# Altium PCB dummypcbfile.PcbDoc
Units mil, origin at the board's own origin, x right, y up, seen from the top; angles counter-clockwise.
Board outline 3900 x 1500 mil, 2 copper layers (Top Layer, Bottom Layer); 14 components, 8 nets, 43 pads, 0 vias.
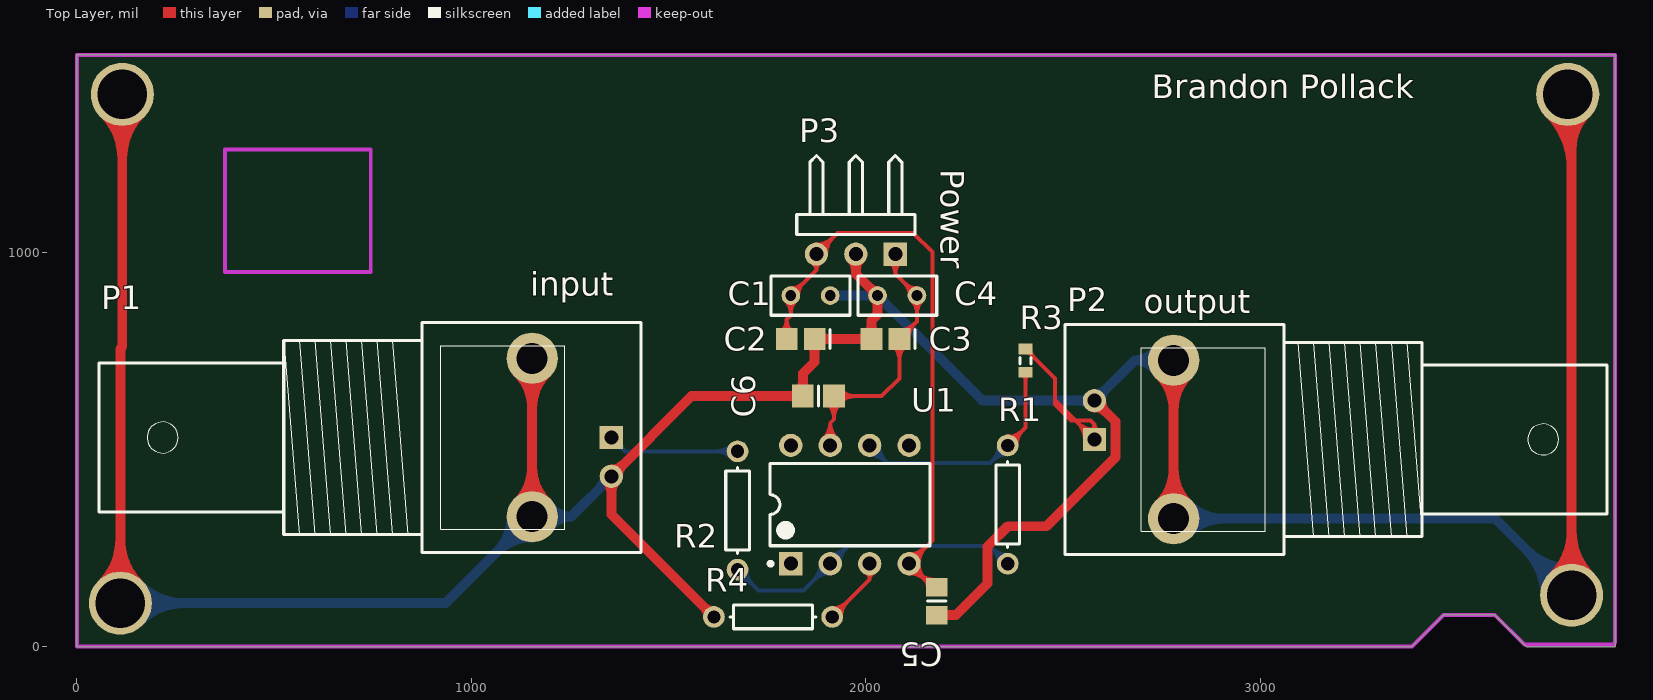
[diagram p0: Top Layer view]
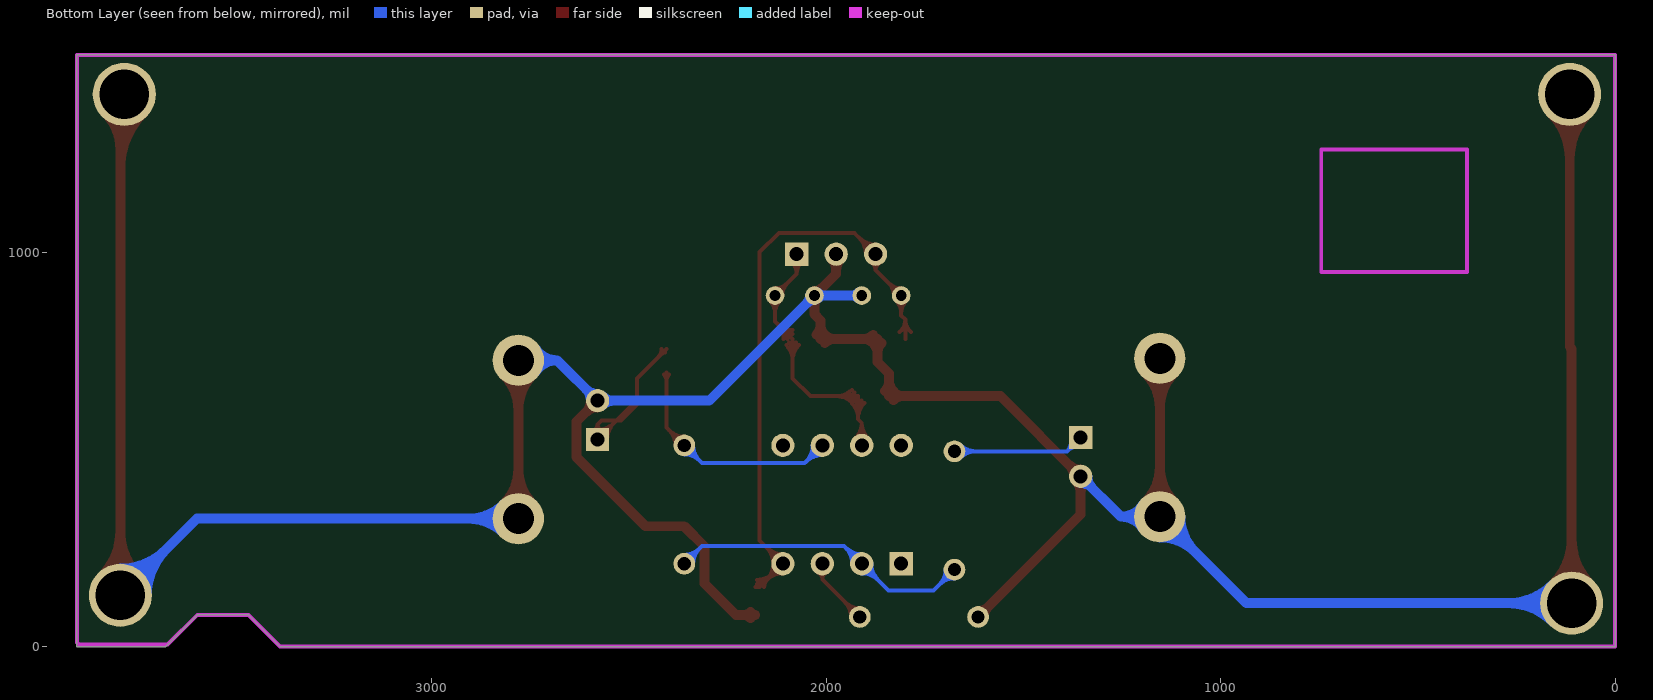
[diagram p1: Bottom Layer view, seen from below]

## Layer stack, top to bottom
Top Layer: signal copper 1.4
Dielectric: core 12.6, FR-4, Dk 4.8
Bottom Layer: signal copper 1.4

## Board outline
0,0 0,1500 3900,1500 3900,0 3675,0 3600,75 3595,80 3480,80 3465,80 3395,10 3385,0 0,0

## Design rules (kind name [scope] priority, off if disabled: settings)
Clearance [All] p1: gap=10
PolygonConnect [All] p1: connectstyle=Relief reliefconductorwidth=10 reliefentries=4 polygonreliefangle="90 Angle" airgapwidth=10
RoutingVias [All] p1: holewidth=28 width=50 viastyle="Through Hole" minholewidth=28 minwidth=50 maxholewidth=28 maxwidth=50
SilkscreenOverComponentPads [All] p1: minsilkscreentomaskgap=10
SolderMaskExpansion [All] p1: expansion=4
Width "Schematic Width Constraint" [InNet('GND')] p1: maxlimit=30 minlimit=20 preferedwidth=25
Width [All] p2: maxlimit=10 minlimit=10 preferedwidth=10
27 further rules are at their usual default settings.

## Components (designator, comment, footprint, x,y, rotation, side; value= is the part's Value field where it differs from the comment)
C1 "Cap" RAD-0.1 1860,890 r0 top
C2 "Cap Pol1" C2512 1835,780 r180 top
C3 "Cap Pol1" C2512 2050,780 r180 top
C4 "Cap" RAD-0.1 2080,890 r180 top
C5 "Cap" 6-0805_N 2180,115 r90 top
C6 "Cap" 6-0805_M 1880,635 r180 top
P1 "input" "BNC_RA CON" 1355,530 r0 top
P2 "output" "BNC_RA CON" 2580,525 r180 top
P3 "Power" HDR1X3H 2075,995 r180 top
R1 "Res1" AXIAL-0.3 2360,360 r90 top
R2 "Res1" AXIAL-0.3 1675,345 r270 top
R3 "Res3" J1-0603 2405,725 r90 top
R4 "Res1" AXIAL-0.3 1765,75 r0 top
U1 "Op Amp" DIP-8 1960,360 r90 top

## Footprints (in the part's own frame and the unit in brackets; to place one, negate y for a bottom-side part, rotate by r counter-clockwise, add the part's x,y. Pads: shape width x height; smd on the part's side, far side on the other; paste and mask are expansions set on the pad)
6-0805_M [mm] "Chip Resistor, Body 2.0x1.2mm, IPC Low Density"
  rect 1.4x1.5 smd: 1(-1,0) 2(1,0)
  silkscreen extent 0,-0.65 0,0.65, body extent -1.07,-0.7 1.07,0.7, height 0.7
6-0805_N [mm] "Chip Resistor, Body 2.0x1.2mm, IPC Medium Density"
  rect 1.2x1.4 smd: 1(-0.9,0) 2(0.9,0)
  silkscreen extent 0,-0.6 0,0.6, body extent -1.07,-0.7 1.07,0.7, height 0.7
AXIAL-0.3 [mm] "Axial Device, Thru-Hole; 2 Leads; 0.3 in Pin Spacing"
  round 1.4 hole 0.85: 1(-3.81,0) 2(3.81,0)
  silkscreen extent -2.77,-0.76 2.77,0.76
"BNC_RA CON" [mm] "Connector; BNC Elbow"
  rect 1.5x1.5 hole 0.9: 1(0,0)
  round 3.3 hole 2: 2(-5.1,-5.1) 2(-5.1,5.1)
  round 1.5 hole 0.9: 2(0,-2.5)
  silkscreen extent -33,-7.4 1.9,7.4
C2512 [mm] "Chip Capacitor, Body 2.54x1.27mm, IPC High Density"
  rect 1.4x1.4 smd: 1(-0.9,0) 2(0.9,0)
  silkscreen extent -1.9,-0.6 -1.9,0.6, body extent -1.45,-0.82 1.45,0.82, height 1.3
DIP-8 [mm] "DIP; 8 Leads; Row Spacing 7.62 mm; Pitch 2.54 mm"
  rect 1.5x1.5 hole 0.9: 1(-3.81,3.81)
  round 1.5 hole 0.9: 2(-3.81,1.27) 3(-3.81,-1.27) 4(-3.81,-3.81) 5(3.81,-3.81) 6(3.81,-1.27) 7(3.81,1.27) 8(3.81,3.81)
  silkscreen extent -3.93,-5.15 2.65,5.23, body extent -3.6,-5.15 3.6,5.15, height 5.08
HDR1X3H [mm] "Connector; Header; 3 Position; Right Angle"
  rect 1.5x1.5 hole 0.9: 1(0,0)
  round 1.5 hole 0.9: 2(2.54,0) 3(5.08,0)
  silkscreen extent -1.27,-6.35 6.35,-1.27
J1-0603 [mm] "Chip Resistor, Body 1.6x0.8mm, IPC High Density"
  rect 0.7x0.9 smd: 1(-0.75,0) 2(0.75,0)
  silkscreen extent -0.2,-0.35 0.2,0.35, body extent -0.85,-0.48 0.85,0.48, height 0.9
RAD-0.1 [mm] "Radial Cap, Thru-Hole; 2 Leads; 0.1 in Pin Spacing"
  round 1.2 hole 0.7: 1(-1.27,0) 2(1.27,0)
  silkscreen extent -2.54,-1.27 2.54,1.27

## Part data
C1 C4 C5 C6: "Capacitor"
C2 C3: "Polarized Capacitor (Radial)"
P1 P2: library part BNC, "BNC Elbow Connector"
P3: library part "Header 3H", "Header, 3-Pin, Right Angle"
R1 R2 R3 R4: "Resistor"
U1: "FET Operational Amplifier"

## Free pads (board coordinates)
  round 160 hole 125: 0(110,110) 1(115,1400) 2(3780,1400) 3(3790,130)

## Nets (pads, with @x,y where several pads share a name; then routed paths per layer and width w, separated by ;. In a path a pad name is that pad's centre, name@x,y a point inside that pad or via, vN(x,y) a via of type N, cw(c..) or ccw(c..) an arc to the next point about the centre after c; other vN are vias at no path point)
+12VDC: C3.1 C4.1 C6.1 P3.1 U1.7 | length 1595.8
  Top Layer w10: U1.7@1893.14,527.81 ccw(c1856.04,567) 1910,567 ; U1.7@1900.01,520.55 ccw(c1878.04,543.76) 1910,543.76 ccw(c1941.96,543.76) U1.7@1919.99,520.55 ; C6.1@1903.42,617.08 cw(c1864.91,578.57) 1919.37,578.57 cw(c1973.83,578.57) C6.1@1935.32,617.08 ; U1.7 1910,567 ; C6.1@1910.49,624.15 cw(c1889.05,602.71) 1919.37,602.71 cw(c1949.69,602.71) C6.1@1928.25,624.15 ; U1.7@1926.86,527.81 cw(c1963.96,567) 1910,567 ; C6.1@1928.25,626.12 cw(c1949.69,604.68) 1949.69,635 cw(c1949.69,665.32) C6.1@1928.25,643.88 ; C6.1@1935.32,619.05 cw(c1973.83,580.54) 1973.83,635 cw(c1973.83,689.46) C6.1@1935.32,650.95 ; P3.1@2059.99,975.6 cw(c2036.31,945) 2075,945 ; P3.1@2066.11,983.51 cw(c2052.08,965.39) 2075,965.39 cw(c2097.92,965.39) P3.1@2083.89,983.51 ; C3.1@2069.48,764.05 cw(c2030.97,725.54) 2085.43,725.54 cw(c2139.9,725.54) C3.1@2101.39,764.05 ; P3.1 2075,945 ; C3.1@2076.55,771.12 cw(c2055.11,749.68) 2085.43,749.68 cw(c2115.75,749.68) C3.1@2094.31,771.12 ; C3.1@2085.43,792.56 ccw(c2085.43,822.88) 2106.87,801.44 ccw(c2128.31,780) C3.1@2097.99,780 ; C3.1@2085.43,802.56 ccw(c2085.43,857.02) 2123.94,818.51 ccw(c2162.46,780) C3.1@2107.99,780 ; P3.1@2090.01,975.6 ccw(c2113.69,945) 2075,945 ; C4.1@2111.38,890 ccw(c2066.42,890) 2098.21,921.79 ccw(c2130,953.58) C4.1@2130,908.62 ; C4.1@2116.83,876.83 cw(c2085.04,845.04) 2130,845.04 cw(c2174.96,845.04) C4.1@2143.17,876.83 ; 1910,567 1919.37,576.37 C6.1 2040.43,635 2085.43,680 C3.1 2130,824.57 C4.1 2075,945
-12VDC: C1.1 C2.2 C5.2 P3.3 U1.4 | length 2294
  Top Layer w10: C2.2@1784.9,797.14 ccw(c1757.64,829) 1799.57,829 ; C1.1@1796.83,876.83 cw(c1765.04,845.04) 1810,845.04 cw(c1854.96,845.04) C1.1@1823.17,876.83 ; C2.2 1799.57,829 ; C1.1@1810,908.62 ccw(c1810,953.58) 1841.79,921.79 ccw(c1873.58,890) C1.1@1828.62,890 ; C2.2@1814.23,797.14 cw(c1841.5,829) 1799.57,829 ; P3.3@1863.88,973.14 cw(c1854.65,955) 1875,955 ; P3.3@1875,1009.53 ccw(c1875,1044.6) 1899.8,1019.8 ccw(c1924.6,995) P3.3@1889.53,995 ; P3.3@1875,1019.53 ccw(c1875,1078.74) 1916.87,1036.87 ccw(c1958.74,995) P3.3@1899.53,995 ; P3.3@1886.12,973.14 ccw(c1895.35,955) 1875,955 ; U1.4@2110,185.47 cw(c2110,126.26) 2151.87,168.13 cw(c2193.74,210) 2134.53,210 cw(c2193.74,210) 2151.87,251.87 cw(c2110,293.74) U1.4@2110,234.53 ; U1.4@2110,195.47 cw(c2110,160.4) 2134.8,185.2 cw(c2159.6,210) 2124.53,210 cw(c2159.6,210) 2134.8,234.8 cw(c2110,259.6) U1.4@2110,224.53 ; 2133.19,186.81 ccw(c2176.06,229.69) C5.2@2176.06,169.05 ; 2148.87,171.13 cw(c2128.16,150.43) C5.2@2157.44,150.43 ; 2150.26,169.74 ccw(c2176.06,195.55) C5.2@2176.06,159.05 ; C5.2 2169.57,150.43 U1.4 2169,269 2169,1000 2120,1049 1929,1049 P3.3 1875,955 ; 1799.57,829 1810,839.43 C1.1 1875,955
GND: C1.2 C2.1 C3.2 C4.2 C5.1 C6.2 P1.2 P2.2 P3.2 pad.0 pad.1 pad.2 pad.3 R4.1 | length 14917.2
  Top Layer w25: pad.0@62.27,157.73 ccw(c-52.96,272.96) 110,272.96 ccw(c272.96,272.96) pad.0@157.73,157.73 ; pad.1@67.27,1352.27 cw(c-47.96,1237.04) 115,1237.04 cw(c277.96,1237.04) pad.1@162.73,1352.27 ; pad.0@79.95,140.05 ccw(c7.4,212.6) 110,212.6 ccw(c212.6,212.6) pad.0@140.05,140.05 ; pad.1@84.95,1369.95 cw(c12.4,1297.4) 115,1297.4 cw(c217.6,1297.4) pad.1@145.05,1369.95 ; pad.0 110,755 115,760 pad.1 ; P1.2@1117.12,366.31 ccw(c1027.56,455.86) 1154.21,455.86 ccw(c1280.86,455.86) P1.2@1191.31,366.31 ; P1.2@1117.12,693.69 cw(c1027.56,604.14) 1154.21,604.14 cw(c1280.86,604.14) P1.2@1191.31,693.69 ; P1.2@1134.79,348.63 ccw(c1087.92,395.51) 1154.21,395.51 ccw(c1220.51,395.51) P1.2@1173.63,348.63 ; P1.2@1134.79,711.37 cw(c1087.92,664.49) 1154.21,664.49 cw(c1220.51,664.49) P1.2@1173.63,711.37 ; P1.2@1154.21,329.21 P1.2@1154.21,730.79 ; P1.2@1342.96,419.53 cw(c1313.89,390.47) 1355,390.47 cw(c1396.11,390.47) P1.2@1367.04,419.53 ; P1.2@1355,448.6 ccw(c1355,489.71) 1384.07,460.64 ccw(c1413.14,431.57) P1.2@1372.03,431.57 ; R4.1@1599.94,75 ccw(c1563.59,75) 1589.29,100.71 ccw(c1615,126.41) R4.1@1615,90.06 ; R4.1 1355,335 1355,431.57 1558.43,635 C6.2 1840.63,692 1870.43,721.8 C2.1 C3.2 2014.57,827 2030,842.43 C4.2 1975,945 P3.2 ; C6.2@1829.98,624.35 ccw(c1804.27,598.64) 1804.27,635 ccw(c1804.27,671.36) C6.2@1829.98,645.65 ; C6.2@1829.98,647.62 ccw(c1804.27,673.32) 1840.63,673.32 ccw(c1876.99,673.32) C6.2@1851.28,647.62 ; C2.1@1859.79,769.35 cw(c1834.08,743.64) 1870.43,743.64 cw(c1906.79,743.64) 1881.08,769.35 cw(c1906.79,743.64) 1906.79,780 cw(c1906.79,816.36) C2.1@1881.08,790.65 ; P3.2@1962.96,982.96 cw(c1933.89,953.89) 1975,953.89 cw(c2016.11,953.89) P3.2@1987.04,982.96 ; C3.2@2003.92,769.35 ccw(c1978.21,743.64) 1978.21,780 ccw(c1978.21,816.36) 2003.92,790.65 ccw(c1978.21,816.36) 2014.57,816.36 ccw(c2050.92,816.36) C3.2@2025.21,790.65 ; C4.2@2018.88,890 ccw(c1992.03,890) 2011.01,908.99 ccw(c2030,927.97) C4.2@2030,901.12 ; C4.2@2022.14,882.14 cw(c2003.15,863.15) 2030,863.15 cw(c2056.85,863.15) C4.2@2037.86,882.14 ; C5.1 2228.57,79.57 2309,160 2309,254 2360,305 2458,305 2633,480 2633,570.43 P2.2@2580,623.43 ; C5.1@2191.8,71.7 cw(c2210.79,52.72) 2210.79,79.57 cw(c2210.79,106.42) C5.1@2191.8,87.43 ; P2.2@2580,606.4 cw(c2580,565.29) 2609.07,594.36 cw(c2638.14,623.43) P2.2@2597.03,623.43 ; P2.2@2743.69,361.31 ccw(c2654.14,450.86) 2780.79,450.86 ccw(c2907.44,450.86) P2.2@2817.88,361.31 ; P2.2@2743.69,688.69 cw(c2654.14,599.14) 2780.79,599.14 cw(c2907.44,599.14) P2.2@2817.88,688.69 ; P2.2@2761.37,343.63 ccw(c2714.49,390.51) 2780.79,390.51 ccw(c2847.08,390.51) P2.2@2800.21,343.63 ; P2.2@2761.37,706.37 cw(c2714.49,659.49) 2780.79,659.49 cw(c2847.08,659.49) P2.2@2800.21,706.37 ; P2.2@2780.79,324.21 P2.2@2780.79,725.79 ; pad.2@3732.27,1352.27 cw(c3592.9,1212.9) 3790,1212.9 ; pad.3@3742.27,177.73 ccw(c3627.04,292.96) 3790,292.96 ccw(c3952.96,292.96) pad.3@3837.73,177.73 ; pad.2@3749.95,1369.95 cw(c3653.25,1273.25) 3790,1273.25 ; pad.3@3759.95,160.05 ccw(c3687.4,232.6) 3790,232.6 ccw(c3892.6,232.6) pad.3@3820.05,160.05 ; pad.2 3790,1400 pad.3 ; 3790,1261.18 cw(c3918.82,1261.18) pad.2@3827.73,1352.27
  Bottom Layer w25: pad.0 935,110 1154.21,329.21 1252.64,329.21 ; pad.0@140.05,79.95 cw(c212.6,7.4) 212.6,110 cw(c212.6,212.6) pad.0@140.05,140.05 ; pad.0@157.73,62.27 cw(c272.96,-52.96) 272.96,110 cw(c272.96,272.96) pad.0@157.73,157.73 ; P1.2@1101.75,329.21 cw(c975.1,329.21) 1064.66,239.66 cw(c1154.21,150.1) P1.2@1154.21,276.75 ; P1.2@1126.75,329.21 cw(c1060.46,329.21) 1107.33,282.33 cw(c1154.21,235.46) P1.2@1154.21,301.75 ; P1.2@1197.76,299.97 cw(c1252.63,263.12) 1252.63,329.21 ; P1.2@1197.76,358.46 ccw(c1252.63,395.31) 1252.63,329.21 ; P1.2@1337.97,431.57 cw(c1296.86,431.57) 1325.93,402.51 cw(c1355,373.44) P1.2@1355,414.55 ; P1.2@1355,431.57 1252.64,329.21 ; C1.2 C4.2 2296.57,623.43 2580,623.43 2682.36,725.79 ; C1.2@1917.86,882.14 cw(c1936.85,863.15) 1936.85,890 cw(c1936.85,916.85) C1.2@1917.86,897.86 ; C4.2@2022.14,882.14 ccw(c2003.15,863.15) 2003.15,890 ccw(c2003.15,916.85) C4.2@2022.14,897.86 ; C4.2@2030,878.88 cw(c2030,852.03) 2048.99,871.01 cw(c2067.97,890) C4.2@2041.12,890 ; P2.2@2567.96,611.39 ccw(c2538.89,582.32) 2538.89,623.43 ccw(c2538.89,664.53) P2.2@2567.96,635.47 ; P2.2@2580,640.45 ccw(c2580,681.56) 2609.07,652.49 ccw(c2638.14,623.43) P2.2@2597.03,623.43 ; P2.2@2737.24,696.54 ccw(c2682.37,659.69) 2682.37,725.79 ; P2.2@2737.24,755.03 cw(c2682.37,791.88) 2682.37,725.79 ; P2.2@2780.79,324.21 3595.79,324.21 pad.3 ; P2.2@2780.79,725.79 2682.36,725.79 ; P2.2@2800.21,304.79 cw(c2847.08,257.92) 2847.08,324.21 cw(c2847.08,390.51) P2.2@2800.21,343.63 ; P2.2@2817.88,287.12 cw(c2907.44,197.56) 2907.44,324.21 cw(c2907.44,450.86) P2.2@2817.88,361.31 ; pad.3@3722.5,130 ccw(c3559.54,130) 3674.77,245.23 ccw(c3790,360.46) pad.3@3790,197.5 ; pad.3@3747.5,130 ccw(c3644.9,130) 3717.45,202.55 ccw(c3790,275.1) pad.3@3790,172.5
INPUT: P1.1 R2.1 | length 537
  Bottom Layer w10: P1.1 1390,495 ; P1.1@1358.3,505.69 cw(c1363.36,468.36) 1390,495 ; P1.1@1379.31,526.7 ccw(c1416.64,521.64) 1390,495 ; R2.1@1659.05,479.05 ccw(c1620.54,440.54) 1620.54,495 ccw(c1620.54,549.46) R2.1@1659.05,510.95 ; R2.1@1666.12,486.12 ccw(c1644.68,464.68) 1644.68,495 ccw(c1644.68,525.32) R2.1@1666.12,503.88 ; R2.1 1390,495
NetP2_1: P2.1 R3.2 | length 693.5
  Top Layer w10: R3.2 2480,679.53 2480,625 ; R3.2@2408.94,745.75 cw(c2408.94,734.06) R3.2@2417.2,742.32 ; R3.2@2417.72,754.53 ccw(c2448.42,754.53) 2426.71,732.82 ; P2.1@2555.47,525 ccw(c2496.26,525) 2538.13,566.87 ccw(c2580,608.74) P2.1@2580,549.53 ; P2.1@2565.47,525 ccw(c2530.4,525) 2555.2,549.8 ccw(c2580,574.6) P2.1@2580,539.53 ; P2.1@2569.9,547.35 ccw(c2562.83,563) 2580,563 ; P2.1@2590.1,547.35 cw(c2597.17,563) 2580,563 ; 2480,625 2532,573 ; 2480,625 2480,613 2520,573 2532,573 ; 2532,573 P2.1 2580,563 ; 2532,573 2570,573 2580,563
NetR1_1: R1.1 R2.2 U1.2 | length 1335
  Bottom Layer w10: R2.2@1675,172.44 cw(c1675,117.98) 1713.51,156.49 cw(c1752.02,195) R2.2@1697.56,195 ; R2.2@1675,182.44 cw(c1675,152.12) 1696.44,173.56 cw(c1717.88,195) R2.2@1687.56,195 ; R2.2 1728,142 1842,142 U1.2 1955,255 2315,255 R1.1 ; U1.2@1885.47,210 cw(c1826.26,210) 1868.13,168.13 cw(c1910,126.26) U1.2@1910,185.47 ; U1.2@1895.47,210 cw(c1860.4,210) 1885.2,185.2 cw(c1910,160.4) U1.2@1910,195.47 ; U1.2@1910,224.53 ccw(c1910,259.6) 1934.8,234.8 ccw(c1959.6,210) U1.2@1924.53,210 ; U1.2@1910,234.53 ccw(c1910,293.74) 1951.87,251.87 ccw(c1993.74,210) U1.2@1934.53,210 ; R1.1@2337.44,210 ccw(c2282.98,210) 2321.49,248.51 ccw(c2360,287.02) R1.1@2360,232.56 ; R1.1@2347.44,210 ccw(c2317.12,210) 2338.56,231.44 ccw(c2360,252.88) R1.1@2360,222.56
NetR1_2: R1.2 R3.1 U1.6 | length 1039.1
  Top Layer w10: R1.2 2405,555 R3.1 ; R1.2@2360,522.56 ccw(c2360,552.88) 2381.44,531.44 ccw(c2402.88,510) R1.2@2372.56,510 ; R1.2@2360,532.56 ccw(c2360,587.02) 2398.51,548.51 ccw(c2437.02,510) R1.2@2382.56,510 ; R3.1@2398.79,689.26 cw(c2383.8,674.28) 2405,674.28 cw(c2426.2,674.28) R3.1@2411.21,689.26
  Bottom Layer w10: U1.6@2010,485.47 cw(c2010,426.26) 2051.87,468.13 cw(c2093.74,510) U1.6@2034.53,510 ; U1.6@2010,495.47 cw(c2010,460.4) 2034.8,485.2 cw(c2059.6,510) U1.6@2024.53,510 ; U1.6 2055,465 2315,465 R1.2 ; R1.2@2337.44,510 cw(c2282.98,510) 2321.49,471.49 cw(c2360,432.98) R1.2@2360,487.44 ; R1.2@2347.44,510 cw(c2317.12,510) 2338.56,488.56 cw(c2360,467.12) R1.2@2360,497.44
NetR4_2: R4.2 U1.3 | length 352.3
  Top Layer w10: R4.2 2010,170 ; R4.2@1915,87.56 ccw(c1915,117.88) 1936.44,96.44 ccw(c1957.88,75) R4.2@1927.56,75 ; R4.2@1915,97.56 ccw(c1915,152.02) 1953.51,113.51 ccw(c1992.02,75) R4.2@1937.56,75 ; U1.3@1998.88,188.14 cw(c1989.65,170) 2010,170 ; U1.3 2010,170 ; U1.3@2021.12,188.14 ccw(c2030.35,170) 2010,170
pads on no net: U1.1 U1.5 U1.8

## Keep-outs
Keep-Out Layer:
  lines w10: 0,0 3385,0 3465,80 3595,80 3670,5 3895,5 3900,10 3900,1500 0,1500 0,0 ; 375,950 745,950 745,1260 375,1260 375,950

## Silkscreen, mask and mechanical layers (free items; w line width, h text height)
Top Overlay:
  text "Brandon Pollack" at 2725,1390 h60